# EAGLE board HackflightBrushed (EAGLE 7.7.0)
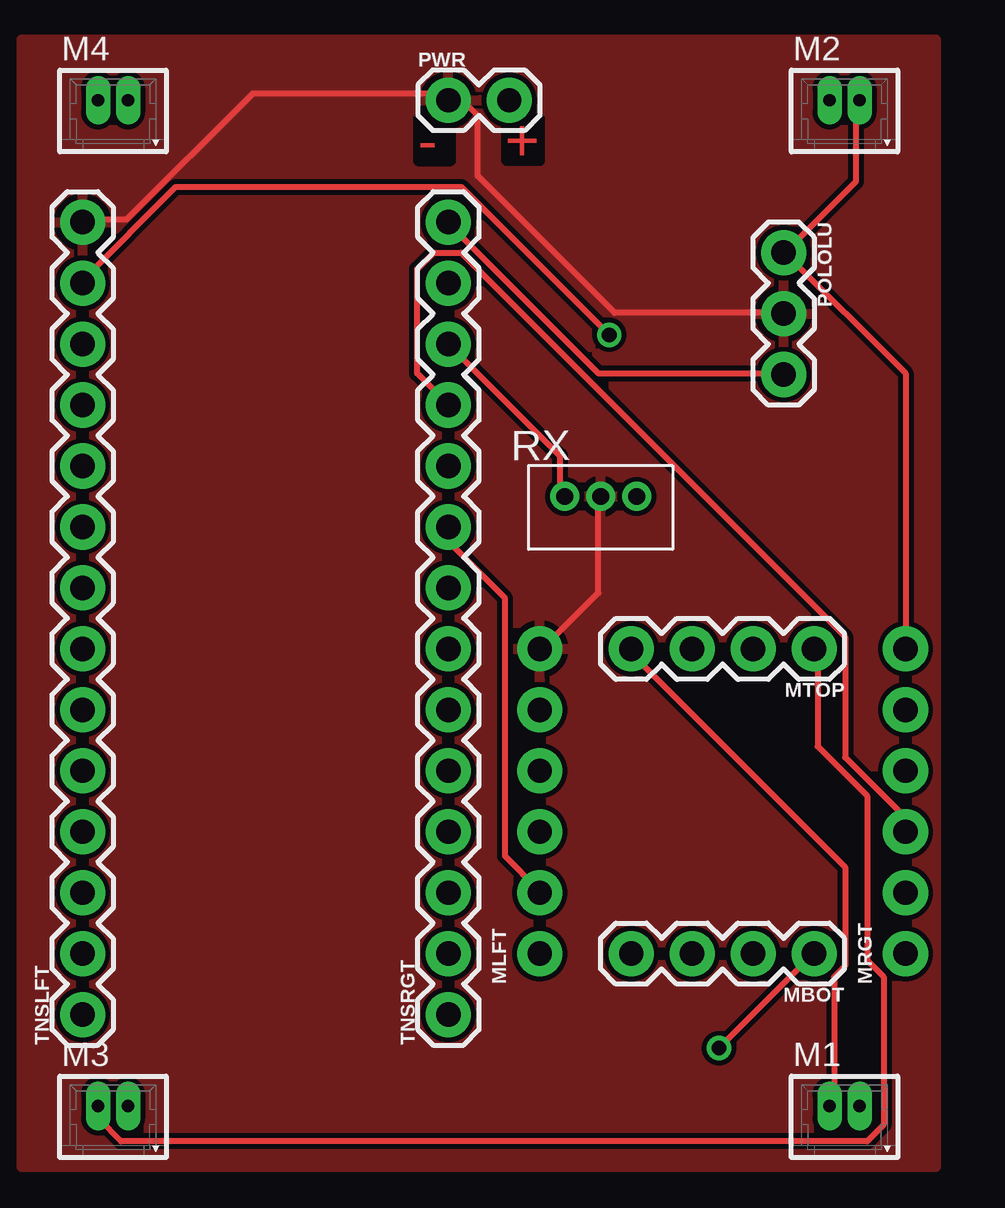
[diagram p0: board, top side]
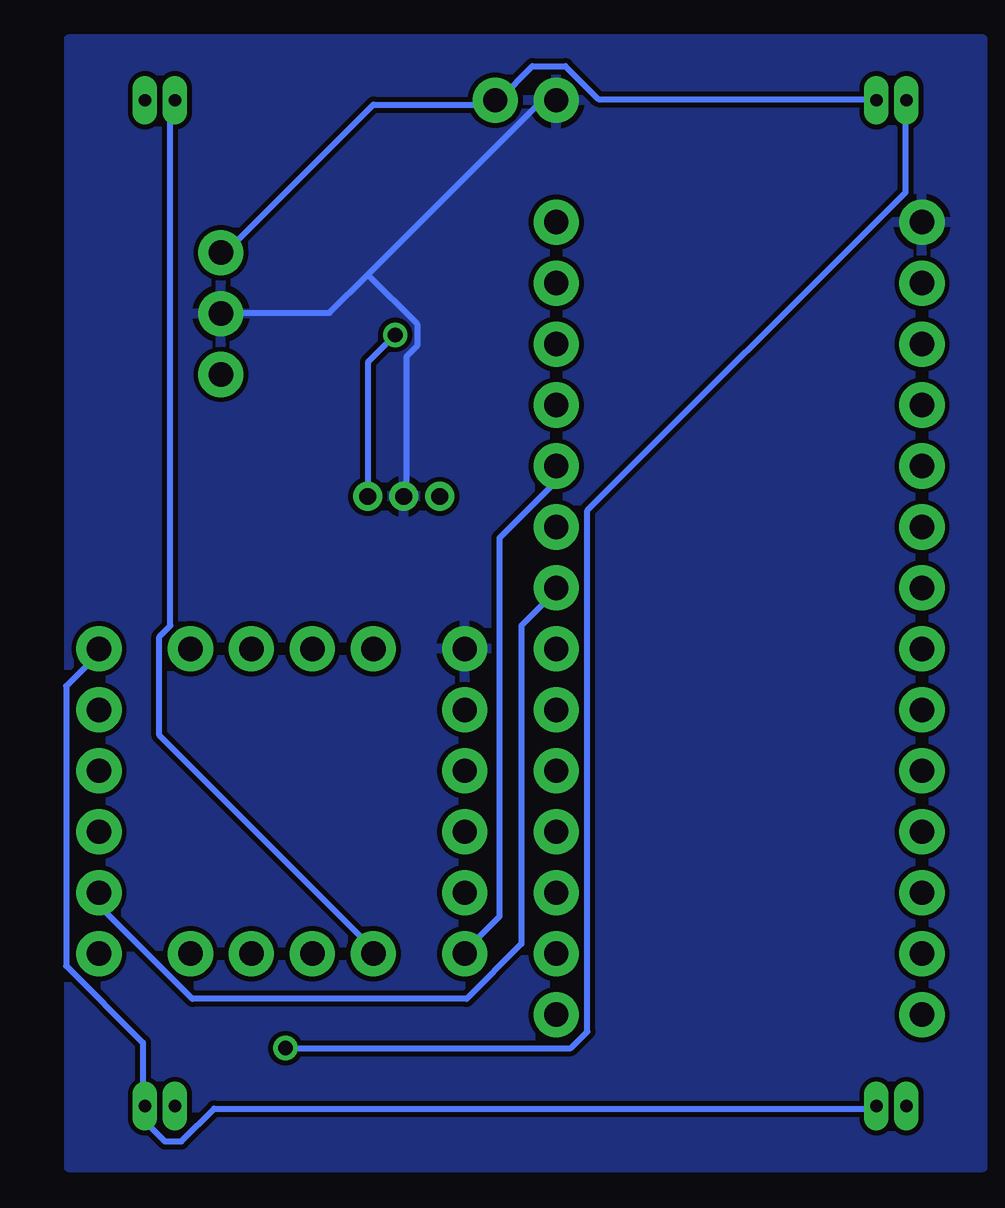
[diagram p1: board, bottom side, seen from below]

No outline drawn. Coordinates in mm, seen from the top.
Copper layers (1*16): Top 0.035mm / dielectric 1.5mm / Bottom 0.035mm
Design rules "default": minimum track width 10mil, minimum drill 24mil, track to track 8mil, track to pad 8mil, pad to pad 8mil, via to via 8mil, smd to smd 8mil, copper to edge 40mil, drill to drill 8mil, minimum pad ring 10mil, minimum via ring 8mil, stop-mask expansion 4mil, vias tented up to drill 0mil, thermal gap 10mil

## Footprints (pad centres in the part's own frame; a part is rotated, then mirrored left to right if it is on the bottom)
53047-0210 = drill 0.508 long: 1 0.625,0; 2 -0.625,0
1X04 = drill 1.016 pad 1.88: 1 0,0; 2 2.54,0; 3 5.08,0; 4 7.62,0
1X06_NO_SILK = drill 1.016 pad 1.88: 1 0,0; 2 2.54,0; 3 5.08,0; 4 7.62,0; 5 10.16,0; 6 12.7,0
1X03 = drill 1.016 pad 1.88: 1 0,0; 2 2.54,0; 3 5.08,0
1X02 = drill 1.016 pad 1.88: 1 0,0; 2 2.54,0
B3B-ZR = drill 0.7 pad 1.1: 1 -1.5,0; 2 0,0; 3 1.5,0
1X14 = drill 1.016 pad 1.88: 1 0,0; 2 2.54,0; 3 5.08,0; 4 7.62,0; 5 10.16,0; 6 12.7,0; 7 15.24,0; 8 17.78,0; 9 20.32,0; 10 22.86,0; 11 25.4,0; 12 27.94,0; 13 30.48,0; 14 33.02,0

## Placement (x,y rotation side)
M1  53047-0210  [53047-0210]  43.18,33.02 0 top
M2  53047-0210  [53047-0210]  43.18,74.93 0 top
M3  53047-0210  [53047-0210]  12.7,33.02 0 top
M4  53047-0210  [53047-0210]  12.7,74.93 0 top
MBOT  [1X04]  41.91,39.37 180 top
MLFT  [1X06_NO_SILK]  30.48,39.37 90 top
MRGT  [1X06_NO_SILK]  45.72,39.37 90 top
MTOP  [1X04]  41.91,52.07 180 top
POLOLU  [1X03]  40.64,68.58 270 top
PWR  [1X02]  26.67,74.93 0 top
RX  B3B-ZR  [B3B-ZR]  33.02,58.42 0 top
TNSLFT  [1X14]  11.43,36.83 90 top
TNSRGT  [1X14]  26.67,36.83 90 top

## Library data of the parts
M1-M4 = con-molex-picoblade
MBOT MTOP = SparkFun-Connectors; PROD_ID: CONN-09696
MLFT MRGT = SparkFun-Connectors; PROD_ID: CONN-08437
POLOLU PWR TNSLFT TNSRGT = SparkFun-Connectors
RX = jst

## Nets
3.3V: RX.1 TNSRGT.12
5VREG: POLOLU.3 TNSRGT.14
GND: MLFT.6 POLOLU.2 PWR.1 RX.2 TNSLFT.14
M1-: M1.2 MTOP.4
M1PWM: MRGT.2 TNSRGT.8
M2-: M2.2 MBOT.4
M2PWM: MLFT.2 TNSRGT.9
M3-: M3.2 MTOP.1
M3PWM: MLFT.1 TNSRGT.10
M4-: M4.2 MBOT.1
M4PWM: MRGT.3 TNSRGT.11
RX1: RX.3 TNSLFT.13
VBAT: M1.1 M2.1 M3.1 M4.1 MRGT.6 POLOLU.1 PWR.2

## Tracks (layer width: path | path; a pad name or v marks a point on that pad's centre or on a via)
3.3V
  Top 0.254: TNSRGT.12 31.32,60.12 31.32,58.52 RX.1
5VREG
  Top 0.254: POLOLU.3 40.46,63.55 32.92,63.55 26.75,69.72 TNSRGT.14
GND
  Top 0.254: RX.2 32.92,58.29 32.92,54.41 30.63,52.12 MLFT.6 | TNSLFT.14 11.43,69.95 13.26,69.95 18.52,75.21 26.98,75.21 27.89,74.3 27.89,71.78 33.6,66.06 40.46,66.06 POLOLU.2
  Bottom 0.254: 34.52,67.67 36.12,66.06 40.46,66.06 POLOLU.2 | 34.52,67.67 27.43,74.75 26.75,74.75 PWR.1 | 34.52,67.67 32.46,65.61 32.46,64.69 32.92,64.24 32.92,58.52 RX.2
  pour Top: 8.89,77.47 46.99,77.47 46.99,30.48 8.89,30.48
  pour Bottom: 8.89,77.47 46.99,77.47 46.99,30.48 8.89,30.48
M1-
  Top 0.254: M1.2 42.75,33.15 42.75,38.41 43.2,38.86 43.2,42.98 34.29,51.89 MTOP.4
M1PWM
  Bottom 0.254: MRGT.2 45.72,41.38 41.83,37.49 30.4,37.49 28.12,39.78 28.12,53.03 26.75,54.41 TNSRGT.8
M2-
  Bottom 0.254: M2.2 42.75,74.75 42.75,53.03 43.2,52.58 43.2,48.46 34.29,39.55 MBOT.4
M2PWM
  Top 0.254: TNSRGT.9 26.75,57.15 26.75,56.46 29.03,54.18 29.03,43.43 30.4,42.06 MLFT.2
M3-
  Top 0.254: M3.2 12.12,32.92 12.12,32.46 13.03,31.55 44.12,31.55 44.81,32.23 44.81,38.41 44.12,39.09 44.12,45.95 42.06,48.01 42.06,51.89 MTOP.1
M3PWM
  Bottom 0.254: TNSRGT.10 26.75,59.66 26.75,58.98 29.03,56.69 29.03,40.92 30.4,39.55 MLFT.1
M4-  (via drill 0.61)
  Top 0.254: v37.95,35.43 41.83,39.32 MBOT.1
  Bottom 0.254: v37.95,35.43 26.06,35.43 25.38,36.12 25.38,57.84 12.12,71.09 12.12,74.75 M4.2
M4PWM
  Top 0.254: MRGT.3 45.72,45.03 43.2,47.55 43.2,52.58 27.2,68.58 26.06,68.58 25.38,67.89 25.38,63.55 26.52,62.41 TNSRGT.11
RX1  (via drill 0.61)
  Top 0.254: v33.38,65.15 27.2,71.32 15.32,71.32 11.43,67.44 TNSLFT.13
  Bottom 0.254: v33.38,65.15 34.52,64.01 34.52,58.52 RX.3
VBAT
  Top 0.254: MRGT.6 45.72,63.55 40.69,68.58 | 40.69,68.58 43.66,71.55 43.66,74.75 M2.1 | 40.69,68.58 POLOLU.1
  Bottom 0.254: POLOLU.1 40.46,68.58 34.29,74.75 29.26,74.75 PWR.2 29.03,74.98 27.66,76.35 26.29,76.35 24.92,74.98 13.49,74.98 M4.1 | M3.1 13.49,32.92 40.92,32.92 42.29,31.55 42.98,31.55 43.66,32.23 43.66,32.92 M1.1 43.89,33.15 43.89,35.66 47.09,38.86 47.09,50.52 45.72,51.89 MRGT.6

## Text on the board
Top: - | +